# Altium PCB LMD18200直流电机驱动器.PcbDoc
Units mm, origin at the board's own origin, x right, y up, seen from the top; angles counter-clockwise.
Board outline 152.4 x 101.6 mm, 2 copper layers (Top Layer, Bottom Layer); 13 components, 13 nets, 42 pads, 6 vias.
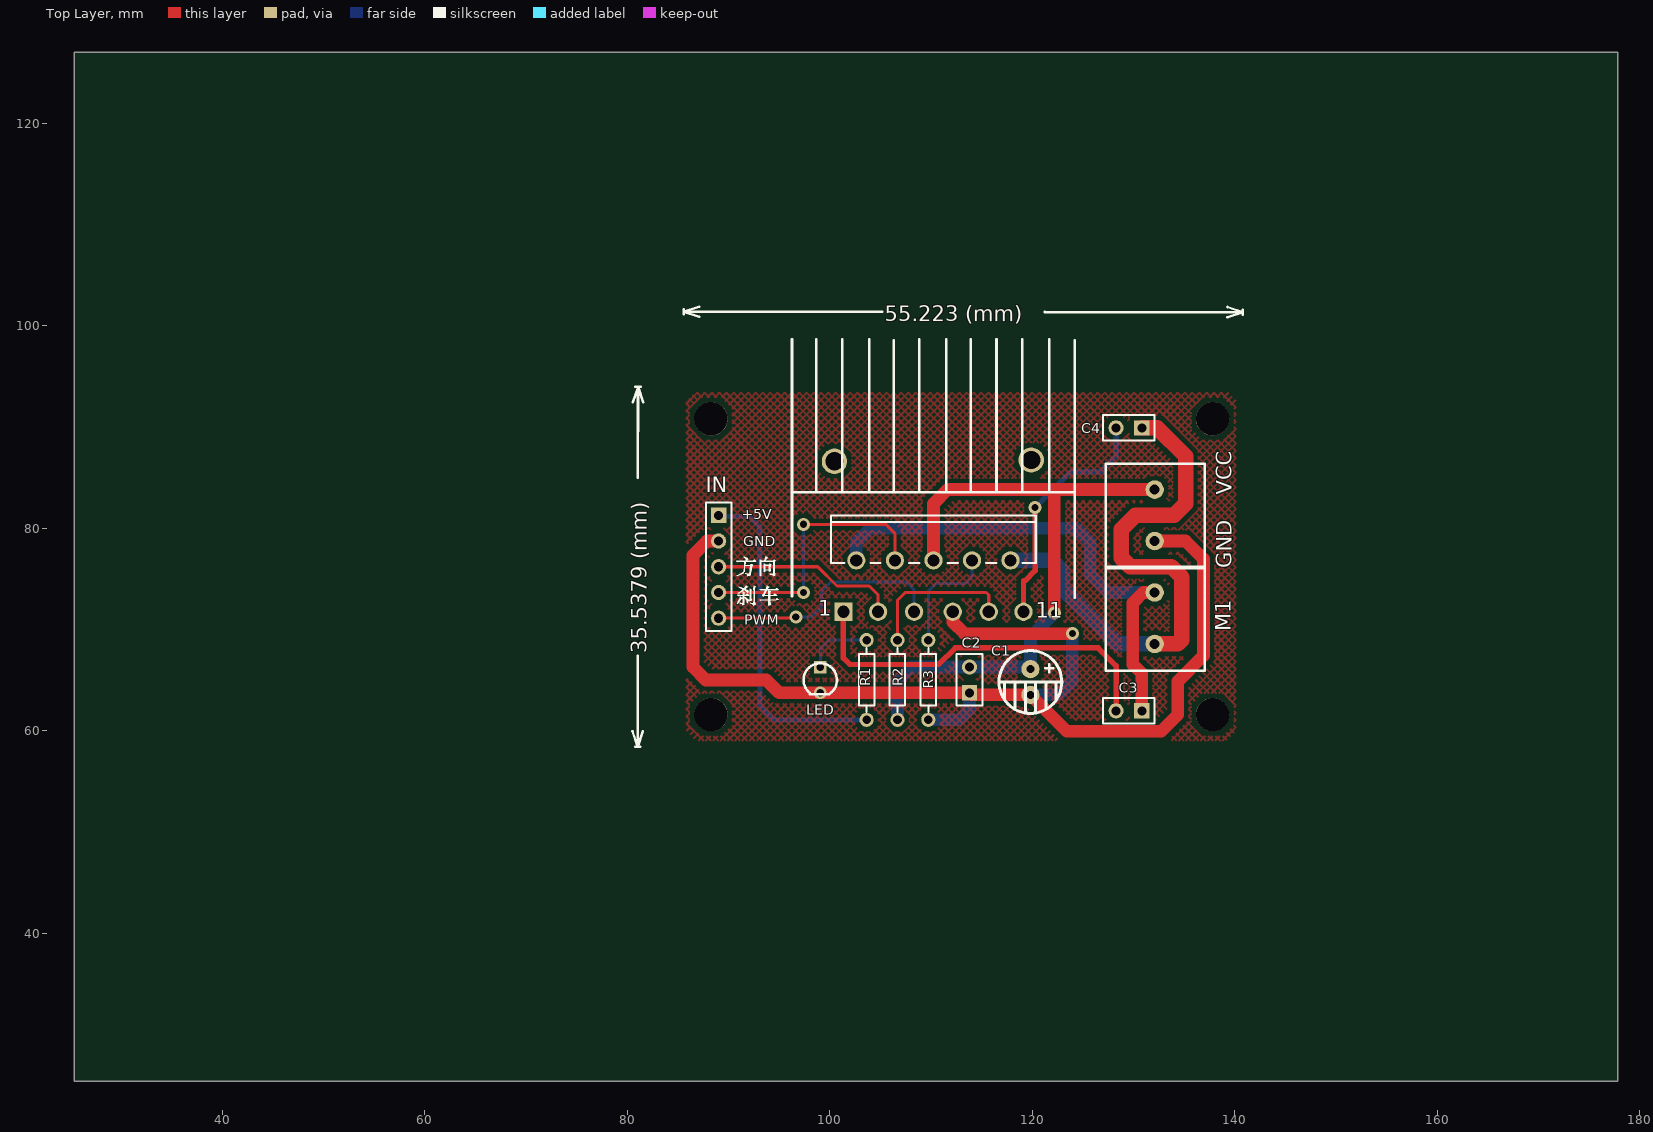
[diagram p0: Top Layer view]
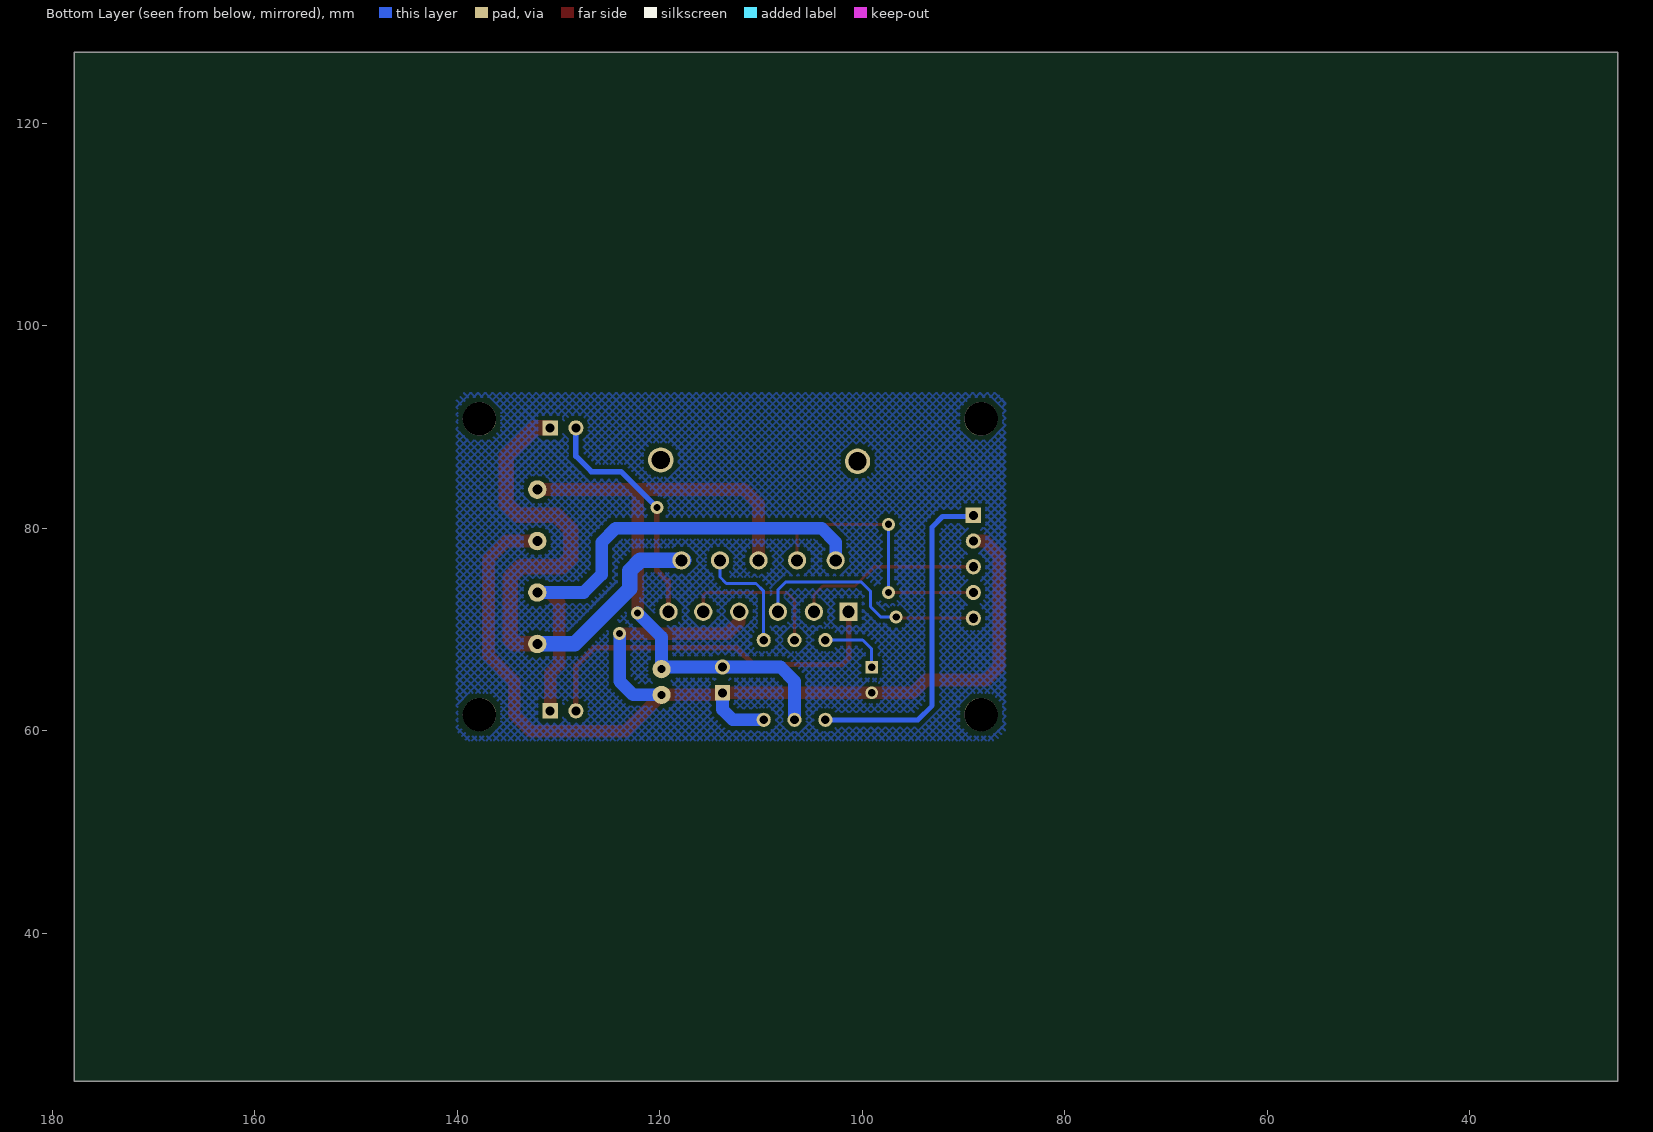
[diagram p1: Bottom Layer view, seen from below]

## Layer stack, top to bottom
Top Layer: signal copper 0.0356
Dielectric: dielectric 0.32, FR-4, Dk 4.8
Bottom Layer: signal copper 0.0356

## Board outline
25.4,25.4 177.8,25.4 177.8,127 25.4,127

## Design rules (kind name [scope] priority, off if disabled: settings)
Clearance [All] p1: gap=0.4
ComponentClearance [All] p1: gap=0.254 collisioncheckmode=3 verticalgap=0.254
PolygonConnect [All] p1: connectstyle=Relief reliefconductorwidth=0.254 reliefentries=4 polygonreliefangle="90 Angle"
RoutingVias [All] p1: holewidth=0.711 width=1.27 viastyle="Through Hole" minholewidth=0.711 minwidth=1.27 maxholewidth=0.711 maxwidth=1.27
SolderMaskExpansion [All] p1: expansion=0.102
TestPointUsage [All] p1: valid=0 allowmultiple=FALSE
Testpoint [All] p1: side=15 testpointundercomponent=TRUE minsize=1.016 maxsize=2.54 preferedsize=1.524 minholesize=0 maxholesize=1.016 preferedholesize=0.813 testpointgrid=0.025 style=1023 order=0123456789
Width Width_8 [InNet('Net_11')] p1: maxlimit=0.54 minlimit=0.54 preferedwidth=0.54
Width Width_7 [InNet('Net_1')] p2: maxlimit=0.54 minlimit=0.54 preferedwidth=0.54
Width Width_6 [InNet('Net_2')] p3: maxlimit=1.254 minlimit=1.254 preferedwidth=1.254
Width Width_5 [InNet('VCC')] p4: maxlimit=1.254 minlimit=1.254 preferedwidth=1.254
Width Width_4 [InNet('VCC')] p5: maxlimit=1.54 minlimit=1.54 preferedwidth=1.54
Width Width_3 [InNet('Net_10')] p6: maxlimit=1.54 minlimit=1.54 preferedwidth=1.54
Width Width_2 [InNet('GND')] p7: maxlimit=1.254 minlimit=1.254 preferedwidth=1.254
Width Width_1 [InNet('+5V')] p8: maxlimit=0.5 minlimit=0.5 preferedwidth=0.5
Width [All] p9: maxlimit=0.3 minlimit=0.3 preferedwidth=0.3
17 further rules are at their usual default settings.

## Classes and differential pairs
component class LMD18200直流电机驱动器: C1 C2 C3 C4 IN LED M1 R1 R2 R3 VCC ""

## Components (designator, comment, footprint, x,y, rotation, side; value= is the part's Value field where it differs from the comment)
C1 "" C-DJ-6 119.888,63.5 r270 top
C2 "104" CPDR 113.792,65.024 r90 top
C3 "104" CPDR 129.54,61.976 r180 top
C4 "104" CPDR 129.54,89.916 r180 top
IN "Header 5" HDR1X5 89.027,81.28 r270 top
LED "LED" LED_D 100.584,64.516 r270 top (schematic designator DS1)
M1 "" JK128_2 133.223,73.152 r0 top
R1 "Res" RSE 103.632,65.024 r270 top
R2 "" RSE 106.68,65.024 r270 top
R3 "" RSE 109.728,65.024 r90 top
VCC "" JK128_2 133.223,83.312 r0 top
? "Comment" YA-30 100.076,86.995 r90 top
? "" LMD18200 110.236,76.835 r0 top

## Footprints (in the part's own frame and the unit in brackets; to place one, negate y for a bottom-side part, rotate by r counter-clockwise, add the part's x,y. Pads: shape width x height; smd on the part's side, far side on the other; paste and mask are expansions set on the pad)
C-DJ-6 [mm] "电容6mm"
  round 1.8 hole 0.8: 1(-2.591,-0.076) 2(-0.051,-0.076)
  silkscreen extent -4.42,-3.18 1.78,3.02
CPDR [mm] "瓷片电容"
  rect 1.5x1.5 hole 0.9: 1(-1.27,0)
  round 1.5 hole 0.9: 2(1.27,0)
  silkscreen extent -2.54,-1.27 2.54,1.27
HDR1X5 [mm] "Connector; Header; 5 Position"
  rect 1.5x1.5 hole 0.9: 1(0,0)
  round 1.5 hole 0.9: 2(2.54,0) 3(5.08,0) 4(7.62,0) 5(10.16,0)
  silkscreen extent -1.27,-1.27 11.43,1.27
JK128_2 [mil] "接线端子"
  round 71.81 hole 39.37: 1(-45,20) 2(-45,-180)
  silkscreen extent -235,-285 150,120
LED_D [mm] "发光二极管_3mm"
  rect 1.25x1.25 hole 0.75: 1(-1.778,-1.524)
  round 1.25 hole 0.75: 2(0.762,-1.524)
  silkscreen extent -2.16,-3.17 0.89,0.13
LMD18200 [mm] "直流电机驱动"
  rect 1.8x1.8 hole 1.2: 1(-8.89,-5.08)
  round 1.8 hole 1.2: 2(-7.62,0) 3(-5.461,-5.08) 4(-3.81,0) 5(-1.905,-5.08) 6(0,0) 7(1.905,-5.08) 8(3.81,0) 9(5.461,-5.08) 10(7.62,0) 11(8.89,-5.08)
  silkscreen extent -10.1,-0.27 10.1,4.43
RSE [mm] "直插电阻1/8W"
  round 1.4 hole 0.85: 1(-3.937,0) 2(3.937,0)
  silkscreen extent -3.17,-0.76 3.17,0.76
YA-30 [mm] "30mmX25mm"
  round 2.5 hole 1.8: ""(-0.381,-0.381) ""(-0.254,-19.812)
  silkscreen extent -13.84,-24.13 11.68,3.81

## Part data
C1: library part "Cap Pol3", "Polarized Capacitor (Surface Mount)"
C2 C3 C4: library part Cap, "Capacitor"
IN: "Header, 5-Pin"
LED: "发光二极管"
M1 VCC: library part MHDR1X2, "Header, 2-Pin"
R1: "电阻"
R2 R3: library part Res2, "Resistor"
?: library part LMD18200

## Free pads (board coordinates)
  round 3.3 hole 3.3: 1(88.265,90.805) 2(88.265,61.595) 3(137.795,61.595) 4(137.795,90.805)

## Via types
v1: diameter 1.27, hole 0.711, Top Layer to Bottom Layer, 6 vias

## Nets (pads, with @x,y where several pads share a name; then routed paths per layer and width w, separated by ;. In a path a pad name is that pad's centre, name@x,y a point inside that pad or via, vN(x,y) a via of type N, cw(c..) or ccw(c..) an arc to the next point about the centre after c; other vN are vias at no path point)
+5V: IN.1 R1.2 | length 33.5
  Bottom Layer w0.5: IN.1@88.9,81.407 89.154,81.153 92.075,81.153 93.091,80.137 93.091,62.484 94.488,61.087 R1.2
GND: ?.7 C1.2 C2.1 IN.2 LED.2 R3.1 VCC.2 | length 116.2
  Top Layer w1.254: IN.2 87.884,78.74 86.487,77.343 86.487,66.294 87.757,65.024 93.726,65.024 94.996,63.754 C2.1 113.995,63.551 C1.2 123.419,59.944 132.715,59.944 134.366,61.595 134.366,64.897 136.906,67.437 136.906,76.962 135.128,78.74 VCC.2 ; ?.7 112.141,70.739 113.284,69.596 v1(123.952,69.596)
  Bottom Layer w1.254: R3.1 112.776,61.087 113.792,62.103 C2.1 ; C1.2 122.606,63.551 123.952,64.897 v1(123.952,69.596)
Net_1: ?.1 C3.2 | length 37.6
  Top Layer w0.54: ?.1 101.346,67.183 101.981,66.548 110.744,66.548 112.395,68.199 126.492,68.199 128.27,66.421 C3.2
Net_2: ?.2 C3.1 M1.1 | length 49.9
  Top Layer w1.254: C3.1 130.81,65.659 129.921,66.548 129.921,72.644 130.937,73.66 M1.1
  Bottom Layer w1.254: ?.2 102.616,78.613 104.013,80.01 124.333,80.01 125.73,78.613 125.73,75.438 127.508,73.66 M1.1
Net_8: ?.8 R3.2 | length 11.4
  Bottom Layer w0.3: R3.2 109.728,73.787 110.49,74.549 113.411,74.549 114.046,75.184 ?.8
Net_9: ?.9 R2.1 | length 15
  Top Layer w0.3: R2.1 106.68,72.898 107.442,73.66 115.443,73.66 115.697,73.406 ?.9
Net_10: ?.10 C4.1 M1.2 | length 55.1
  Top Layer w1.54: C4.1 132.334,89.916 135.128,87.122 135.128,82.423 133.985,81.28 130.175,81.28 128.778,79.883 128.778,77.089 129.667,76.2 133.731,76.2 134.747,75.184 134.747,68.961 134.366,68.58 M1.2
  Bottom Layer w1.54: ?.10@117.602,76.835 121.92,76.835 122.936,75.819 122.936,74.041 128.397,68.58 M1.2
Net_11: ?.11 C4.2 | length 23.7
  Top Layer w0.54: ?.11 119.126,74.803 119.253,74.803 120.269,75.819 v1(120.269,82.042)
  Bottom Layer w0.54: v1(120.269,82.042) 123.825,85.598 126.746,85.598 128.27,87.122 C4.2
NetDS1_1: LED.1 R1.1 | length 6.7
  Bottom Layer w0.3: LED.1 99.06,68.072 99.949,68.961 R1.1
PWM: ?.5 IN.5 | length 24.1
  Top Layer w0.3: IN.5 96.52,71.12 v1(96.647,71.247)
  Bottom Layer w0.3: v1(96.647,71.247) 98.171,71.247 99.187,72.263 99.187,73.787 100.076,74.676 107.569,74.676 108.331,73.914 ?.5
VCC: ?.6 C1.1 C2.2 R2.2 VCC.1 | length 64.3
  Top Layer w1.254: ?.6 110.236,82.423 111.633,83.82 VCC.1 ; v1(122.174,71.628) 122.174,83.82
  Bottom Layer w1.254: R2.2 106.68,64.897 108.077,66.294 119.609,66.294 C1.1 119.812,69.266 v1(122.174,71.628)
刹车: ?.4 IN.4 | length 27.2
  Top Layer w0.3: IN.4 v1(97.409,73.66) ; v1(97.409,80.391) 105.537,80.391 106.426,79.502 ?.4
  Bottom Layer w0.3: v1(97.409,73.66) v1(97.409,80.391)
方向: ?.3 IN.3 | length 18.6
  Top Layer w0.3: IN.3 98.806,76.2 100.711,74.295 103.886,74.295 104.775,73.406 ?.3
pads on no net: ?.

## Polygon pours and split planes (outlines as drawn)
no net on Top Layer (hatched 45Degree grid 0.508 track 0.203): 86.868,59.055 85.852,60.071 85.852,92.456 86.741,93.345 139.319,93.345 140.081,92.583 140.081,60.071 139.065,59.055
no net on Bottom Layer (hatched 45Degree grid 0.508 track 0.203): 86.868,59.055 85.852,60.071 85.852,92.456 86.741,93.345 139.319,93.345 140.081,92.583 140.081,60.071 139.192,59.182 139.065,59.055

## Silkscreen, mask and mechanical layers (free items; w line width, h text height)
Top Overlay:
  drawing of 500 lines, arcs and shapes, not listed
  text "55.223 (mm)" at 105.41,100.457 h1.52 r359.95
  text "+5V" at 91.313,80.899 h1.02
  text "GND" at 91.44,78.232 h1.02
  text "GND" at 139.7,76.073 h1.52 r90
  text "PWM" at 91.567,70.485 h1.02
  text "35.5379 (mm)" at 81.95,67.656 h1.52 r89.94
Mechanical 1:
  lines w0.5: 85.217,59.69 86.36,58.547 139.573,58.547 140.716,59.69 140.716,92.837 139.573,93.98 86.36,93.98 85.217,92.837 85.217,59.69

## Text inside footprints (layer, text, board x,y; h text height)
?: Top Overlay "11" at 120.319,71.173 h1.5; Top Overlay "1" at 98.857,71.344 h1.5